# Altium PCB NUC972 DEV BOARD-2 20150128.PcbDoc (part 4 of 5)
Units mil, origin at the board's own origin, x right, y up, seen from the top; angles counter-clockwise.
Board outline 10236.22 x 7677.17 mil, 4 copper layers (Top, 2-GND, 3-POWER, Bottom), stack 35.4 mil thick; 572 components, 593 nets, 2369 pads, 1783 vias.
Unrouted connection lines stored in the file: 1277.
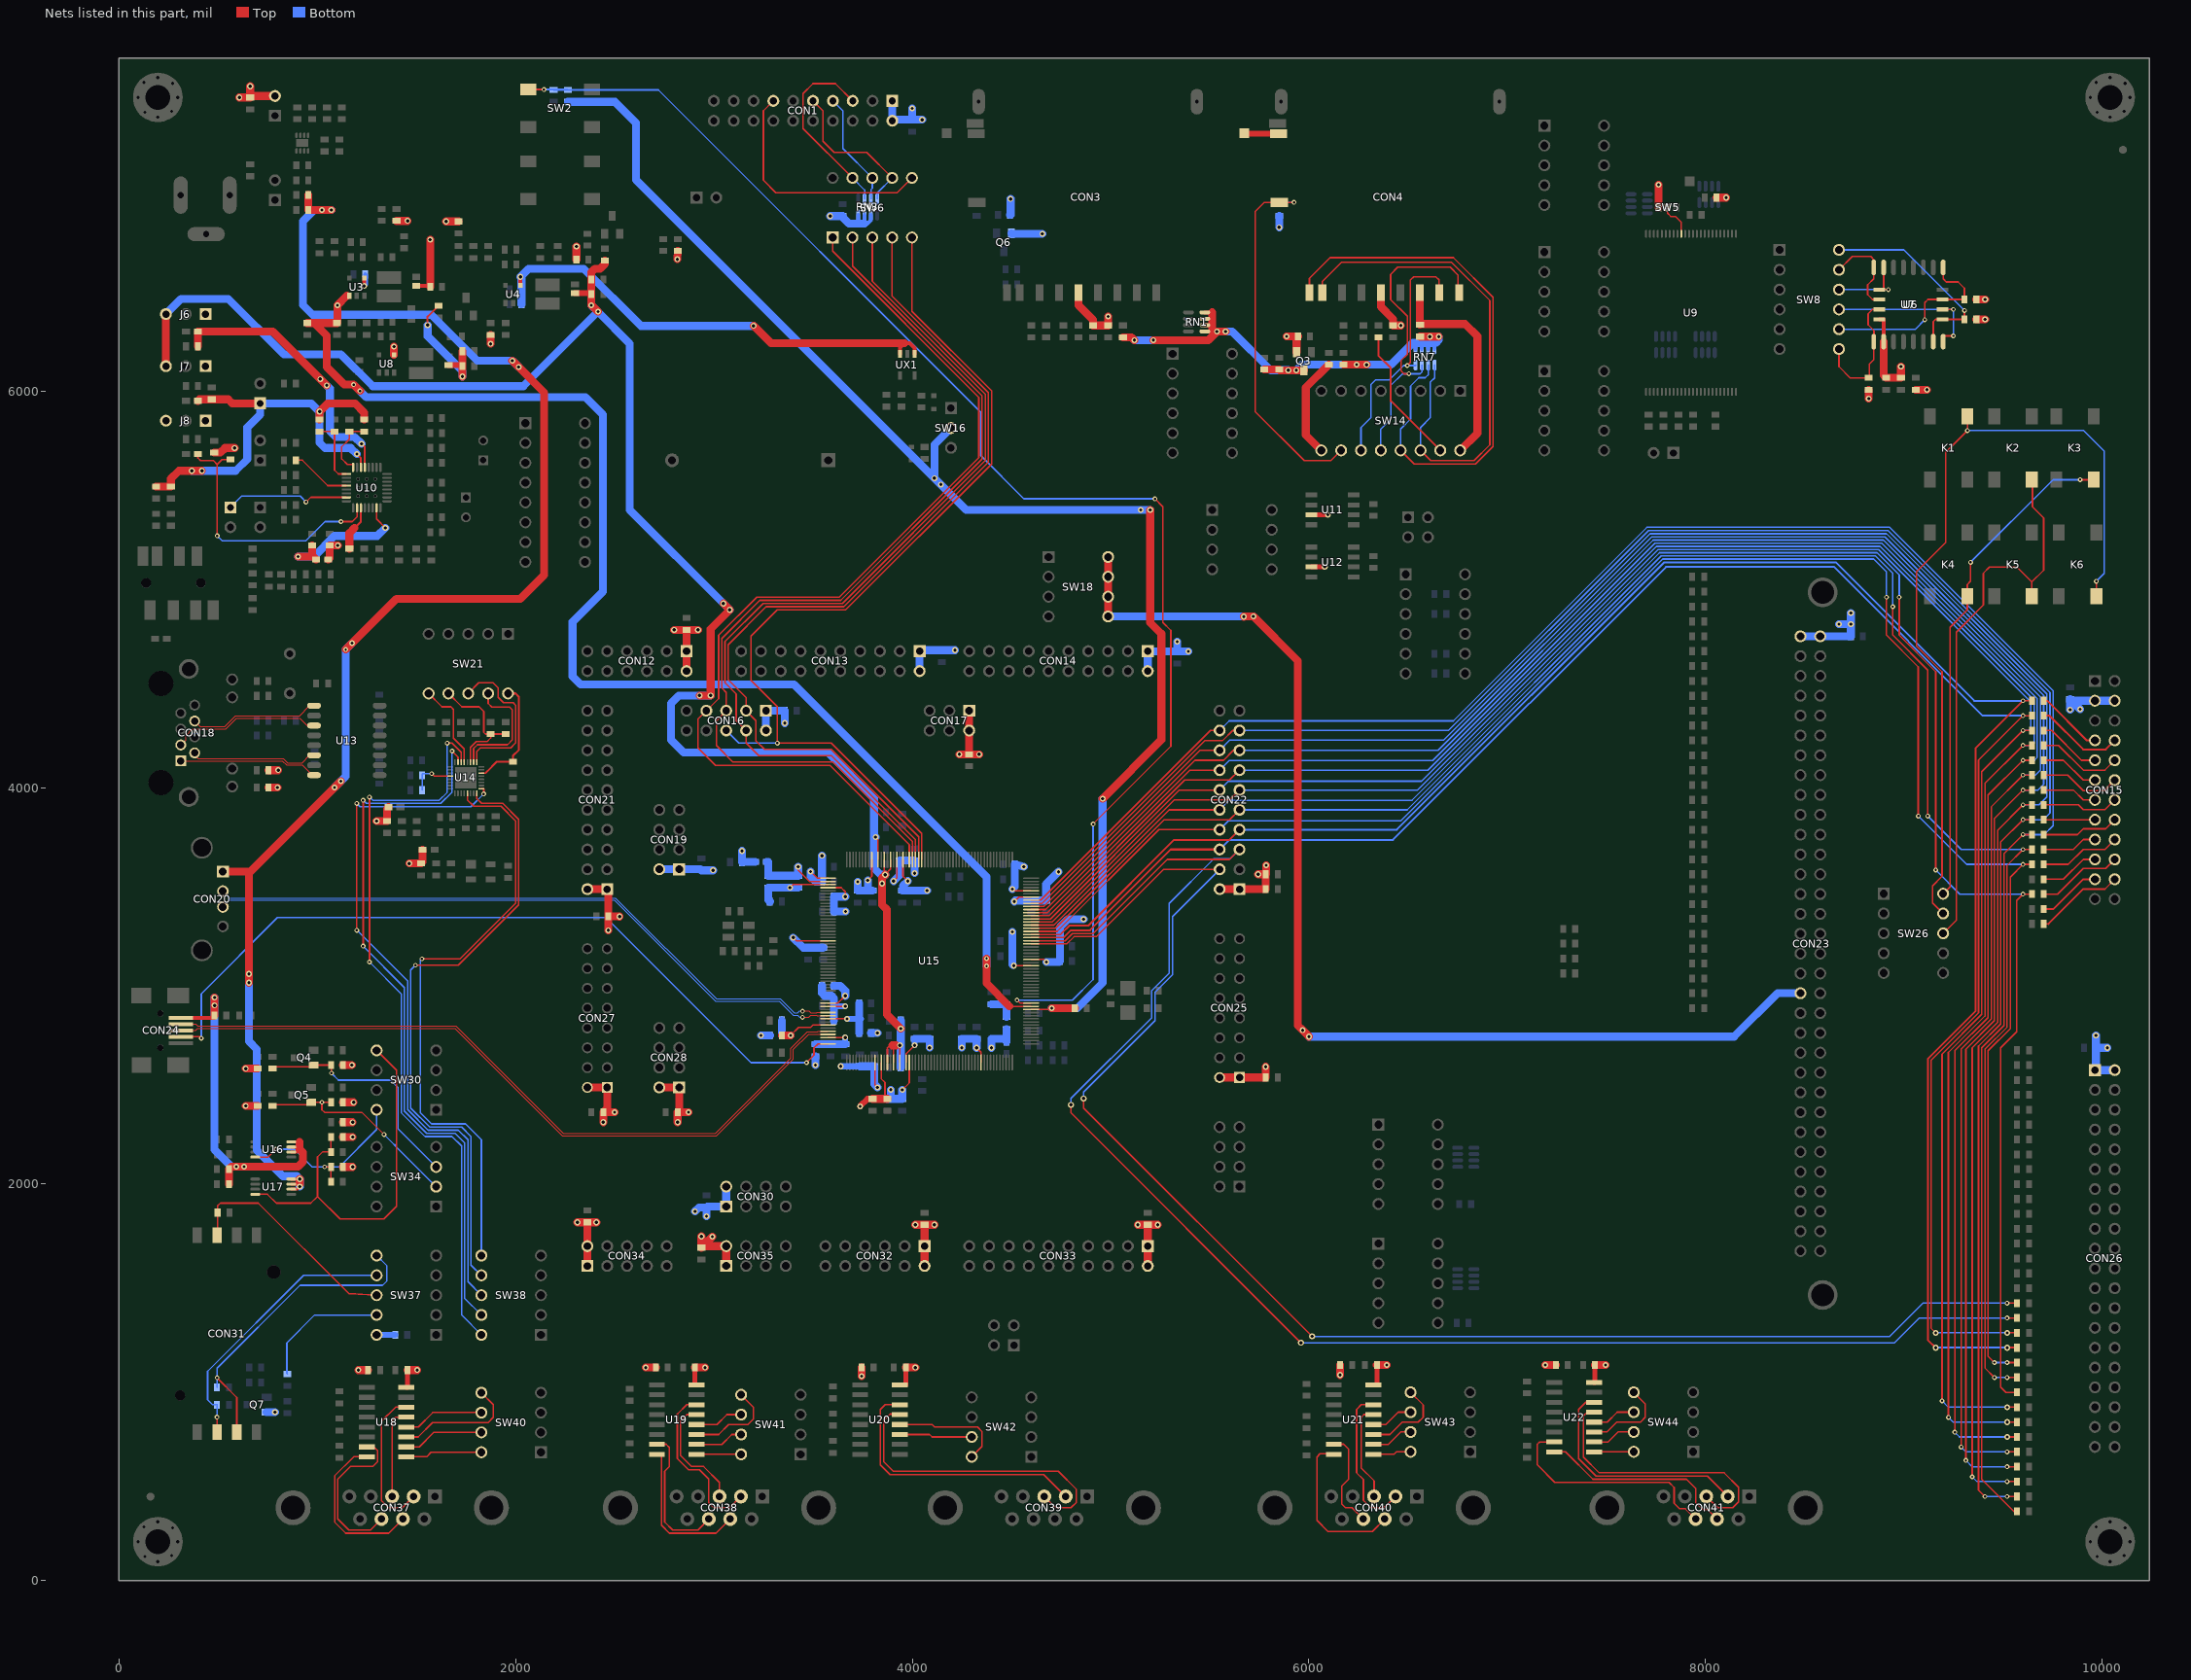
[diagram p6: the nets of this part, all layers, seen from the top]

## Via types
v1: diameter 24, hole 12, Top to Bottom, 1202 vias
v2: diameter 30, hole 16, Top to Bottom, 581 vias

## Nets (pads, with @x,y where several pads share a name; then routed paths per layer and width w, separated by ;. In a path a pad name is that pad's centre, name@x,y a point inside that pad or via, vN(x,y) a via of type N, cw(c..) or ccw(c..) an arc to the next point about the centre after c; other vN are vias at no path point) (continued)
PI1: CON22.4 RB22.1 U15.87 | length 7846.8
  Top w8: U15.87@4599.31,3211.61 4779.61,3211.61 4816,3248 4928,3248 5267.5,3587.5 CON22.4@5550,3587.5 ; v2(4864,2432) 4864,2384 v2(6016,1232) ; v1(9520,1400) RB22.1@9570,1400
  Bottom w8: v2(4864,2432) 4864,2464 5224,2824 5224,2968 5312,3056 5312,3349.5 CON22.4@5550,3587.5 ; v2(6016,1232) 8928,1232 9096,1400 v1(9520,1400)
PI2: CON22.5 RB23.1 U15.88 | length 8271.5
  Top w8: U15.88@4599.31,3227.36 4771.36,3227.36 4808,3264 4912,3264 5285.5,3637.5 5600,3637.5 CON22.5@5650,3687.5 ; v2(4800,2400) 4800,2360 v2(5960,1200) ; v1(9520,1325) RB23.1@9570,1325
  Bottom w8: v2(4800,2400) 4800,2432 5208,2840 5208,2976 5296,3064 5296,3416 5520,3640 5602.5,3640 CON22.5@5650,3687.5 ; v2(5960,1200) 8952,1200 9077,1325 v1(9520,1325)
PI3: CON22.6 RB24.1 RS2.1 U15.89 | length 9854.9
  Top w8: U15.89@4599.31,3243.11 4763.11,3243.11 4768,3248 ; v2(9160,1250) 9136,1274 9136,2624 9376,2864 9376,4138.5 v1(9600,4362.5) RS2.1@9645,4362.5 ; v2(9520,1250) RB24.1@9570,1250
  Top w10: 4768,3248 4800,3280 4896,3280 5303.5,3687.5 CON22.6@5550,3687.5
  Bottom w8: v2(9160,1250) v2(9520,1250)
  Bottom w10: CON22.6@5550,3687.5 5598.5,3736 6424,3736 7800,5112 8648,5112 9397.5,4362.5 v1(9600,4362.5)
PI4: CON22.7 RB25.1 RS3.1 U15.90 | length 10000.4
  Top w8: U15.90@4599.31,3258.86 4746.86,3258.86 4752,3264 ; v1(9600,4437.5) RS3.1@9645,4437.5
  Top w10: 4752,3264 4792,3304 4888,3304 5320,3736 5598.5,3736 CON22.7@5650,3787.5 ; v2(9160,1175) 9120,1215 9120,2632 9360,2872 9360,4197.5 v1(9600,4437.5) ; v2(9520,1175) RB25.1@9570,1175
  Bottom w10: CON22.7@5650,3787.5 6443.5,3787.5 7792,5136 8656,5136 9354.5,4437.5 v1(9600,4437.5) ; v2(9160,1175) v2(9520,1175)
PI5: CON22.8 RB26.1 RS4.1 U15.91 | length 9801.6
  Top w8: U15.91@4599.31,3274.61 4730.61,3274.61 5243.5,3787.5 CON22.8@5550,3787.5 ; v1(8912,4960) 8912,4768 9072,4608 v1(9072,3856) ; v1(9456,1100) 9424,1132 9424,2672 9536,2784 9536,3548.5 v1(9600,3612.5) RS4.1@9645,3612.5 ; v1(9520,1100) RB26.1@9570,1100
  Bottom w8: CON22.8@5550,3787.5 5594.5,3832 6464,3832 7784,5152 8848,5152 8856,5144 8912,5088 v1(8912,4960) ; v1(9072,3856) 9315.5,3612.5 v1(9600,3612.5) ; v1(9456,1100) v1(9520,1100)
PI6: CON22.9 RB27.1 RS5.1 U15.92 | length 9926.5
  Top w8: U15.92@4599.31,3290.35 4722.35,3290.35 5269.5,3837.5 5600,3837.5 CON22.9@5650,3887.5 ; v1(8944,4912) 8944,4768 9120,4592 v1(9120,3856) ; v1(9456,1025) 9408,1073 9408,2680 9520,2792 9520,3607.5 v1(9600,3687.5) RS5.1@9645,3687.5 ; v1(9520,1025) RB27.1@9570,1025
  Bottom w8: CON22.9@5650,3887.5 6495.5,3887.5 7776,5168 8856,5168 8944,5080 v1(8944,4912) ; v1(9120,3856) 9288.5,3687.5 v1(9600,3687.5) ; v1(9456,1025) v1(9520,1025)
PI7: CON22.10 RB28.1 RS6.1 U15.93 | length 9926.1
  Top w8: U15.93@4599.31,3306.1 4714.1,3306.1 5295.5,3887.5 CON22.10@5550,3887.5 ; v1(8976,4960) 8976,4768 9160,4584 v1(9160,3584) ; RB28.1@9570,950 9514,950 9488,976 9488,2688 9568,2768 9568,3430.5 v1(9600,3462.5) RS6.1@9645,3462.5
  Bottom w8: CON22.10@5550,3887.5 5598.5,3936 6520,3936 7768,5184 8864,5184 8976,5072 v1(8976,4960) ; v1(9160,3584) 9281.5,3462.5 v1(9600,3462.5)
PI8: CON22.11 RB29.1 RS7.1 U15.94 | length 10302.3
  Top w8: U15.94@4599.31,3321.85 4705.85,3321.85 5321.5,3937.5 5600,3937.5 CON22.11@5650,3987.5 ; v1(9192,907) 9192,2656 9392,2856 9392,4079.5 v1(9600,4287.5) RS7.1@9645,4287.5 ; v2(9520,875) RB29.1@9570,875
  Bottom w8: CON22.11@5650,3987.5 6547.5,3987.5 7760,5200 8872,5200 9640,4432 9640,4295.5 9632,4287.5 v1(9600,4287.5) ; v1(9192,907) 9224,875 v2(9520,875)
PI9: CON22.12 RB30.1 RS8.1 U15.95 | length 10378.1
  Top w8: U15.95@4599.31,3337.6 4697.6,3337.6 5347.5,3987.5 CON22.12@5550,3987.5 ; v1(9224,824) 9224,2664 9408,2848 9408,4020.5 v1(9600,4212.5) RS8.1@9645,4212.5 ; v2(9520,800) RB30.1@9570,800
  Bottom w8: CON22.12@5550,3987.5 5594.5,4032 6568,4032 7752,5216 8880,5216 9656,4440 9656,4224 9644.5,4212.5 v1(9600,4212.5) ; v1(9224,824) 9248,800 v2(9520,800)
PI10: CON22.13 RB31.1 RS9.1 U15.96 | length 10449.5
  Top w8: U15.96@4599.31,3353.35 4689.35,3353.35 5373.5,4037.5 5600,4037.5 CON22.13@5650,4087.5 ; v1(9256,749) 9256,2672 9424,2840 9424,3961.5 v1(9600,4137.5) RS9.1@9645,4137.5 ; v2(9520,725) RB31.1@9570,725
  Bottom w8: CON22.13@5650,4087.5 6599.5,4087.5 7744,5232 8888,5232 9672,4448 9672,4152 9657.5,4137.5 v1(9600,4137.5) ; v1(9256,749) 9280,725 v2(9520,725)
PI11: CON22.14 RB32.1 RS10.1 U15.97 | length 10516.3
  Top w8: U15.97@4599.31,3369.09 4681.09,3369.09 5399.5,4087.5 CON22.14@5550,4087.5 ; v1(9288,674) 9288,2680 9440,2832 9440,3902.5 v1(9600,4062.5) RS10.1@9645,4062.5 ; v1(9520,650) RB32.1@9570,650
  Bottom w8: CON22.14@5550,4087.5 5598.5,4136 6624,4136 7736,5248 8896,5248 9688,4456 9688,4088 9662.5,4062.5 v1(9600,4062.5) ; v1(9288,674) 9312,650 v1(9520,650)
PI12: CON22.15 RB33.1 RS11.1 U15.98 | length 10594.3
  Top w8: U15.98@4599.31,3384.84 4672.84,3384.84 5425.5,4137.5 5569.5,4137.5 5619.5,4187.5 CON22.15@5650,4187.5 ; v1(9312,607) 9312,2680 9456,2824 9456,3843.5 v1(9600,3987.5) RS11.1@9645,3987.5 ; v1(9520,575) RB33.1@9570,575
  Bottom w8: CON22.15@5650,4187.5 6651.5,4187.5 7728,5264 8904,5264 9704,4464 9704,4016 9675.5,3987.5 v1(9600,3987.5) ; v1(9312,607) 9344,575 v1(9520,575)
PI13: CON22.16 RB34.1 RS12.1 U15.99 | length 10665.7
  Top w8: U15.99@4599.31,3400.59 4664.59,3400.59 5451.5,4187.5 CON22.16@5550,4187.5 ; v1(9344,524) 9344,2688 9472,2816 9472,3784.5 v1(9600,3912.5) RS12.1@9645,3912.5 ; v1(9520,500) RB34.1@9570,500
  Bottom w8: CON22.16@5550,4187.5 5602.5,4240 6680,4240 7720,5280 8912,5280 9720,4472 9720,3952 9680.5,3912.5 v1(9600,3912.5) ; v1(9344,524) 9368,500 v1(9520,500)
PI14: CON22.17 RB35.1 RS13.1 U15.100 | length 10737.1
  Top w8: U15.100@4599.31,3416.34 4656.34,3416.34 5477.5,4237.5 5566,4237.5 5616,4287.5 CON22.17@5650,4287.5 ; v1(9408,425) 9376,457 9376,2696 9488,2808 9488,3725.5 v1(9600,3837.5) RS13.1@9645,3837.5 ; v1(9520,425) RB35.1@9570,425
  Bottom w8: CON22.17@5650,4287.5 6703.5,4287.5 7712,5296 8920,5296 9736,4480 9736,3872 9701.5,3837.5 v1(9600,3837.5) ; v1(9408,425) v1(9520,425)
PI15: CON22.18 RB36.1 RS14.1 U15.101 | length 10750.3
  Top w8: U15.101@4599.31,3432.09 4648.09,3432.09 5503.5,4287.5 CON22.18@5550,4287.5 ; RB36.1@9570,350 9554,350 9392,512 9392,2688 9504,2800 9504,3666.5 v1(9600,3762.5) RS14.1@9645,3762.5
  Bottom w8: CON22.18@5550,4287.5 5598.5,4336 6728,4336 7704,5312 8928,5312 9752,4488 9752,3808 9706.5,3762.5 v1(9600,3762.5)
PJ0: CON16.3 SW6.4 U15.139 | length 4705.8
  Top w8: SW6.4@3899,6774 3899,6477 4384,5992 4384,5640 3656,4912 3264,4912 3072,4720 3072,4544 3162.5,4453.5 CON16.3@3162.5,4387.5 3212.5,4337.5 3212.5,4235.5 3256,4192 3592,4192 4032.38,3751.62 U15.139@4032.38,3636.81
PJ1: CON16.4 SW6.3 U15.140 | length 4763
  Top w8: SW6.3@3799,6774 3799,6553 4368,5984 4368,5648 3648,4928 3248,4928 3056,4736 3056,4528 3112.5,4471.5 3112.5,4337.5 CON16.4@3162.5,4287.5 3162.5,4224 3226.5,4160 3592.63,4160 4016.63,3736 U15.140@4016.63,3636.81
PJ2: CON16.5 SW6.2 U15.141 | length 4925.3
  Top w8: SW6.2@3699,6774 3699,6629 4352,5976 4352,5656 3640,4944 3232,4944 3040,4752 3040,4502.5 3062.5,4480 CON16.5@3062.5,4387.5 3012.5,4337.5 3012.5,4211.5 3096,4128 3600.89,4128 4000.89,3728 U15.141@4000.89,3636.81
PJ3: CON16.6 SW6.5 U15.138 | length 4806.7
  Top w8: SW6.5@3999,6774 3999,6401 4400,6000 4400,5632 3664,4896 3320,4896 3187.5,4763.5 3187.5,4540.5 3320,4408 v1(3320,4224) 3592,4224 4048.13,3767.87 U15.138@4048.13,3636.81
  Bottom w8: CON16.6@3062.5,4287.5 3126,4224 v1(3320,4224)
PJ4: CON16.7 SW6.1 U15.142 | length 5051.5
  Top w8: SW6.1@3599,6774 3599,6705 4336,5968 4336,5664 3632,4960 3216,4960 3024,4768 3024,4449 CON16.7@2962.5,4387.5 2920.5,4345.5 2920.5,4199.5 3008,4112 3585.14,4112 3985.14,3712 U15.142@3985.14,3636.81
PLLVD12: CT73.1 CT75.2 L13.2 U15.164 | length 463.6
  Top w8: v2(3425,3600) 3425,3583 3481.43,3526.57 U15.164@3575.69,3526.57
  Bottom w40: L13.2@3267.5,3625 3275,3625 CT73.1@3275,3555 CT75.2@3425,3555 v2(3425,3600)
PLLVS: CT73.2 CT75.1 RG1.2 U15.165 | length 421.4
  Top w8: v2(3384,3495) 3399.83,3510.83 U15.165@3575.69,3510.83
  Bottom w40: RG1.2@3282.5,3425 3275,3432.5 CT73.2@3275,3495 v2(3384,3495) CT75.1@3425,3495
PSL: SW5.2 U9.39 | length 175.3
  Top w8: SW5.2@7807.5,6925 7808,6924.5 7808,6896 7824,6880 7848,6880 7877.17,6850.83 U9.39@7877.17,6792.62
PWM: CON23.37 SW18.5 SW18.6 SW18.7 SW18.8 | length 5883.9
  Top w40: SW18.5@4987.5,4862.5 SW18.6@4987.5,4962.5 SW18.7@4987.5,5062.5 SW18.8@4987.5,5162.5 ; v2(5672,4862) 5672.5,4862.5 v2(5720,4862.5) 5944,4638.5 5944,2800 v2(5968,2776) v2(6000,2744)
  Bottom w40: SW18.5@4987.5,4862.5 v2(5720,4862.5) ; v2(6000,2744) 8144,2744 8362.6,2962.6 CON23.37@8478.15,2962.6
RAUXI: C16.2 U10.20 | length 308.3
  Top w8: C16.2@892.5,5650 892.84,5650.34 925.66,5650.34 1053.66,5522.34 U10.20@1147.64,5522.34
REGOUT: CB13.2 CT66.1 U14.28 | length 229.5
  Top w8: v1(1577.37,4070) 1590,4057.37 U14.28@1670.76,4057.37
  Bottom w8: CT66.1@1529.5,3987 CB13.2@1529.5,4062 1529.5,4070 v1(1577.37,4070)
RMII0CRSDV: R69.1 R70.2 SW21.7 U14.19 | length 650.6
  Top w8: SW21.7@1662,4474.5 1729.7,4406.8 1817.2,4406.8 1840,4384 1840,4278 1848,4270 R69.1@1875,4270 ; U14.19@1773.12,4128.24 1773.12,4202.38 1802.75,4232 1857,4232 1875,4250 R69.1@1875,4270 ; R70.2@1950,4270 1879,4269.5 R69.1@1875,4270
RMII0MDC: SW38.10 U14.22 | length 3827.2
  Top w8: v1(1264,3120) v1(1264,3952) ; v1(1656,4224) 1680,4224 1725.88,4178.12 U14.22@1725.88,4128.24
  Bottom w8: v1(1264,3120) 1424,2960 1424,2360 1544,2240 1680,2240 1728,2192 1728,1340 SW38.10@1828,1240 ; v1(1264,3952) 1280,3936 1616,3936 1656,3976 v1(1656,4224)
RMII0MDIO: SW38.9 U14.23 | length 3681.3
  Top w8: v1(1232,3200) v1(1232,3936) ; v1(1680,4184) 1710.13,4153.87 U14.23@1710.13,4128.24
  Bottom w8: v1(1232,3200) 1440,2992 1440,2368 1552,2256 1696,2256 1744,2208 1744,1424 SW38.9@1828,1340 ; v1(1232,3936) 1248,3920 1624,3920 1680,3976 v1(1680,4184)
RMII0REFCLK: R72.1 SW21.10 U14.14 | length 583.7
  Top w8: U14.14@1828.24,4073.12 1849.12,4073.12 1856,4080
  Top w10: 1856,4080 1905.83,4129.83 1962.47,4129.83 R72.1@1987.5,4130 1987.5,4160 2016,4188.5 2016,4458.5 2000,4474.5 SW21.10@1962,4474.5
RMII0RXD0: SW21.9 U14.18 | length 619.4
  Top w8: U14.18@1788.87,4128.24 1788.87,4196.91 1807.96,4216 1960,4216 1984,4240 1984,4392 1970.15,4405.85 1880.15,4405.85 1862,4424 SW21.9@1862,4474.5
RMII0RXD1: SW21.8 U14.17 | length 793.1
  Top w8: SW21.8@1762,4474.5 1815,4528 1887,4528 1912,4503 1912,4455 1939.82,4427.18 1988.82,4427.18 2000,4416 2000,4224 1976,4200 1823,4200 1804.62,4181.62 U14.17@1804.62,4128.24
RMII0TXD0: SW38.8 U14.9 | length 3540.4
  Top w8: v1(1200,3280) v1(1200,3920) ; U14.9@1828.24,3994.38 1840,3994.38 v1(1840,3968)
  Bottom w8: v1(1200,3280) 1456,3024 1456,2376 1560,2272 1712,2272 1760,2224 1760,1508 SW38.8@1828,1440 ; v1(1200,3920) 1216,3904 1776,3904 v1(1840,3968)
RMII0TXD1: SW38.7 U14.8 | length 3174.3
  Top w8: v1(1496,3104) 1712,3104 2016,3408 2016,3840 1936,3920 1828.62,3920 1804.62,3944 U14.8@1804.62,3970.76
  Bottom w8: v1(1496,3104) 1472,3080 1472,2384 1568,2288 1728,2288 1776,2240 1776,1592 SW38.7@1828,1540
RMII0TXEN: SW38.6 U14.5 | length 3051.2
  Top w8: v1(1528,3136) 1720,3136 2000,3416 2000,3832 1927,3905 1789.87,3905 1757.37,3937.5 U14.5@1757.37,3970.76
  Bottom w8: v1(1528,3136) 1520,3128 1520,2360 1576,2304 1748,2304 1828,2224 SW38.6@1828,1640
RMIIRXERR: SW21.6 U14.21 | length 447.1
  Top w8: SW21.6@1562,4474.5 1629.5,4407 1674.59,4407 1687.5,4394.09 1687.5,4248.5 1741.63,4194.37 U14.21@1741.63,4128.24
ROW0: K3.3 K4.3 SW26.10 | length 2522.5
  Top w8: SW26.10@9197.64,3464.57 9232,3498.93 9232,4808.32 9319.69,4896 K4.3@9319.69,4965.16 9319.69,5024 9336,5040.32 v1(9336,5136) ; v1(9888,5552) 9956.53,5552 K3.3@9957.19,5552.66
  Bottom w8: v1(9336,5136) 9752,5552 v1(9888,5552)
ROW1: K1.4 K6.3 SW26.9 | length 4189.6
  Top w8: SW26.9@9197.64,3364.57 9144,3418.2 9144,3504 9192,3552 9192,4584 9064,4712 9064,5089.67 9210.13,5235.8 9211,5236 9211,5691 v1(9320,5800) 9320,5872.03 K1.4@9319.69,5872.34 ; K6.3@9969.69,4965.16 v1(9969.69,5040)
  Bottom w8: v1(9320,5800) 9905.69,5800 10009.69,5696 10009.69,5080 v1(9969.69,5040)
ROW2: K2.3 K5.3 SW26.8 | length 2825.7
  Top w8: SW26.8@9197.64,3264.57 9264,3330.93 9264,4784 9400,4920 9400,5080.68 9431.66,5112.34 9569.03,5112.34 9644.69,5036.68 ; K5.3@9644.69,4965.16 9644.69,5036.68 ; K2.3@9644.69,5552.66 9648,5549.34 9648,5416 9704,5360 9704,5096 9644.69,5036.68
RSPKOUT: CON8.1 U10.23 | length 630.8
  Top w8: v1(944,5439.29) 968,5463.29 U10.23@1147.64,5463.29
  Bottom w8: CON8.1@562.5,5412.5 619,5469 914.29,5469 v1(944,5439.29)
RTCVD: CB10.1 R96.2 SW16.2 U15.66 | length 7426.8
  Top w8: U15.66@4599.31,2880.91 4820,2880.91 CB10.1@4820,2887.5
  Top w40: v2(4704,2887.5) CB10.1@4820,2887.5 ; v2(4960,3944) 5256,4240 5256,4776 5200,4832 v2(5200,5400)
  Bottom w40: R96.2@2264,7458 2502.5,7457.5 2608,7352 2608,7064 v2(4112,5560) ; SW16.2@4195.5,5813 4112,5729.5 v2(4112,5560) ; v2(4704,2887.5) 4704.5,2888 4832,2888 4960,3016 v2(4960,3944) ; v2(5200,5400) v2(5152,5400) 4272,5400 v2(4144,5528) v2(4112,5560)
RX+: CON18.3 U13.11 | length 756.7
  Top w4: CON18.3@312.5,4214.76 337.6,4239.87 337.6,4261.56 371.12,4295.08 539.13,4295.08 594.55,4350.5 912,4350.5 950,4312.5 U13.11@984.5,4312.5
RX-: CON18.6 U13.9 | length 657.3
  Top w4: CON18.6@382.58,4335.24 410.74,4307.08 534.16,4307.08 589.58,4362.5 912.5,4362.5 962.5,4412.5 U13.9@984.5,4412.5
S_CLK: CON15.8 RS2.2 | length 447
  Top w10: RS2.2@9705,4362.5 9733.5,4362.5 9904,4192 10017,4192 CON15.8@10062.5,4237.5
S_D0: CON15.9 RS7.2 | length 319.6
  Top w8: RS7.2@9705,4287.5 9744.5,4287.5 9894.5,4137.5 CON15.9@9962.5,4137.5
S_D1: CON15.10 RS8.2 | length 429.6
  Top w8: RS8.2@9705,4212.5 9779.5,4212.5 9904,4088 10013,4088 CON15.10@10062.5,4137.5
S_D2: CON15.11 RS9.2 | length 298.9
  Top w8: RS9.2@9705,4137.5 9804,4137.5 9904,4037.5 CON15.11@9962.5,4037.5
S_D3: CON15.12 RS10.2 | length 412.2
  Top w8: RS10.2@9705,4062.5 9825.5,4062.5 9904,3984 10009,3984 CON15.12@10062.5,4037.5
S_D4: CON15.13 RS11.2 | length 278.2
  Top w8: RS11.2@9705,3987.5 9854,3987.5 9904,3937.5 CON15.13@9962.5,3937.5
S_D5: CON15.14 RS12.2 | length 388.2
  Top w8: RS12.2@9705,3912.5 9879.5,3912.5 9904,3888 10013,3888 CON15.14@10062.5,3937.5
S_D6: CON15.15 RS13.2 | length 257.5
  Top w8: RS13.2@9705,3837.5 CON15.15@9962.5,3837.5
S_D7: CON15.16 RS14.2 | length 388.6
  Top w8: RS14.2@9705,3762.5 9874.5,3762.5 9904,3792 10017,3792 CON15.16@10062.5,3837.5
S_HSYNC: CON15.18 RS4.2 | length 409.3
  Top w8: RS4.2@9705,3612.5 9828.5,3612.5 9904,3688 10013,3688 CON15.18@10062.5,3737.5
S_NRST: CON15.20 RS6.2 | length 430
  Top w8: RS6.2@9705,3462.5 9774.5,3462.5 9904,3592 10017,3592 CON15.20@10062.5,3637.5
S_PCLK: CON15.7 RS3.2 | length 340.3
  Top w10: RS3.2@9705,4437.5 9722.5,4437.5 9922.5,4237.5 CON15.7@9962.5,4237.5
S_PWDN: CON15.19 RS1.2 | length 298.9
  Top w8: RS1.2@9705,3537.5 9804,3537.5 9904,3637.5 CON15.19@9962.5,3637.5
S_VSYNC: CON15.17 RS5.2 | length 278.2
  Top w8: RS5.2@9705,3687.5 9854,3687.5 9904,3737.5 CON15.17@9962.5,3737.5
SC0CD: R120.1 SW37.10 | length 94
  Bottom w30: SW37.10@1300,1240 R120.1@1394,1240
SC0CLK: CON31.3 R123.2 SW37.7 | length 1392
  Top w8: CON31.3@495,749.09 v1(495,825)
  Bottom w8: v1(495,825) R123.2@495,887.5 494.5,888 472,888 448,912 448,1056 932,1540 SW37.7@1300,1540
SC0DAT: CON31.7 R95.2 SW37.8 | length 1145.8
  Top w8: CON31.7@495,1742 495,1752 498,1755 R95.2@498,1856 498,1890 512,1904 702.72,1904 1160,1448 SW37.8@1300,1440
SC0PWR: R122.1 SW37.9 | length 669
  Bottom w8: R122.1@850,1042.5 847.5,1045 847.5,1200 987.5,1340 SW37.9@1300,1340
SC0RST: CON31.2 R121.2 SW37.6 | length 1600.8
  Top w8: v1(495.5,1023.5) 595,924 CON31.2@595,749.09
  Bottom w8: R121.2@495,975 495.5,975.5 v1(495.5,1023.5) 495.5,1071.5 914,1490 1330,1490 1352,1512 1352,1588 SW37.6@1300,1640
SCK: R42.2 RX4.2 U10.16 | length 311.8
  Top w8: U10.16@1181.1,5614.86 1181.1,5629 1152,5629 1124,5657 1124,5718.5 1162.5,5757 R42.2@1162.5,5795 RX4.2@1237.5,5795
SDA: R41.2 RX3.2 U10.17 | length 337.9
  Top w8: RX3.2@1012.5,5795 R41.2@1087.5,5795 1087.5,5600.5 1107,5581 1147.24,5581 U10.17@1147.64,5581.4
SDCD: CON4.10 R99.1 SW14.10 | length 1860.1
  Top w8: v1(5925,6950.89) CON4.10@5850.89,6950.89 5850,6950 5775,6950 5728.5,6903.5 5728.5,5896.5 5977,5648 6110.5,5648 SW14.10@6162.5,5700
  Bottom w8: R99.1@5850,6942.5 5858.39,6950.89 v1(5925,6950.89)
SDCLK: R28.2 SW14.15 | length 699.4
  Top w10: R28.2@6350,6270 6350,6178 6412.5,6115.5 6412.5,5950 SW14.15@6662.5,5700
SDCMD: CON4.2 R29.1 SW14.16 | length 1090.8
  Top w40: CON4.2@6559.74,6496.16 6559.74,6334.26 R29.1@6560,6334 6563.5,6337.5 6787.5,6337.5 6850,6275 6850,5787.5 SW14.16@6762.5,5700
SDD0: CON4.7 RN7.2 SW14.14 | length 2611.6
  Top w8: CON4.7@6067.62,6496.16 6067.62,6552 6163.62,6648 6720,6648 6912,6456 6912,5728 6832,5648 6614.5,5648 SW14.14@6562.5,5700
  Bottom w8: SW14.14@6562.5,5700 6562.5,5816 6612.5,5866 6612.5,6044.5 6633.5,6065.5 RN7.2@6633.5,6130.5
SDD1: CON4.8 RN7.4 SW14.13 | length 2912
  Top w8: CON4.8@6002.66,6496.16 6002.66,6568 6106.66,6672 6728,6672 6928,6472 6928,5720 6840,5632 6530.5,5632 SW14.13@6462.5,5700
  Bottom w8: SW14.13@6462.5,5700 6462.5,5808 6512.5,5858 6512.5,6024.5 6554.5,6066.5 6586.5,6066.5 6601.5,6081.5 RN7.4@6601.5,6130.5
SDD2: CON4.9 RN7.6 SW14.12 | length 1609.1
  Top w8: v1(6504,6086.5) 6480,6086.5 6464,6102.5 6464,6152 6496,6184 6496,6376 6412.11,6459.89 6412.11,6588.11 6448,6624 6712,6624 6752,6584 6752,6500.76 CON4.9@6756.59,6496.16
  Bottom w8: SW14.12@6362.5,5700 6362.5,5806.5 6412.5,5856.5 6412.5,6027 6472,6086.5 v1(6504,6086.5) 6560,6086.5 6569.5,6096 RN7.6@6569.5,6130.5
SDD3: CON4.1 RN7.8 SW14.11 | length 1280.9
  Top w8: v1(6496,6128) 6511.56,6143.56 6511.56,6559.56 6528,6576 6640,6576 6656,6560 6656,6498.33 CON4.1@6658.17,6496.16
  Bottom w8: SW14.11@6262.5,5700 6262.5,5816 6312.5,5866 6312.5,6032.5 6336,6056 6405,6056 6477,6128 v1(6496,6128) 6537.5,6128 RN7.8@6537.5,6130.5
SDPWR: R31.1 SW14.9 | length 513.1
  Top w40: SW14.9@6062.5,5700 5984,5778.5 5984,6016.5 R31.1@6100,6132.5
SDVD33: CT19.2 Q3.D R26.2 R29.2 R30.2 R32.1 RN1.1 RN1.3 RN1.5 RN1.7 RN7.1 RN7.3 RN7.5 RN7.7 | length 2667.4
  Top w20: RN1.7@5475,6300 5512.5,6300 ; RN1.5@5475,6332 5512.5,6332 ; RN1.3@5475,6364 5512.5,6364 ; RN1.1@5475,6396 5512.5,6396
  Top w40: R26.2@5062.5,6270 5106,6270 v2(5120,6256) ; v2(5216,6256) 5492,6256 v2(5536,6300) ; 5512.5,6396 5512.5,6364 5512.5,6332 5512.5,6300 v2(5536,6300) ; v2(5580,6300) v2(5536,6300) ; CT19.2@5775,6107.5 R30.2@5850,6107.5 5853.5,6104 v2(5896,6104) v2(5936,6104) Q3.D@5975,6104.72 ; R32.1@6175,6132.5 v2(6240,6132.5) 6290.5,6132.5 v2(6291,6132) ; R29.2@6560,6274 v2(6610,6274) v2(6655,6274)
  Bottom w20: RN7.7@6537.5,6212.5 6537.5,6242.22 ; RN7.5@6569.5,6212.5 6569.5,6242.22 ; RN7.3@6601.5,6212.5 6601.5,6242.22 ; RN7.1@6633.5,6212.5 6633.5,6242.22
  Bottom w40: v2(5120,6256) v2(5216,6256) ; v2(5536,6300) v2(5580,6300) 5612.72,6300 5808,6104.72 5896,6104.23 v2(5936,6104) 5964.48,6132.5 v2(6240,6132.5) 6415.28,6132.5 6525,6242.22 6537.5,6242.22 6569.5,6242.22 6601.5,6242.22 6633.5,6242.22 6641.86,6243.78 6655,6256.92 v2(6655,6274) v2(6610,6274)
SDWP: CON4.11 PAD2.\ | length 174.6
  Top w30: PAD2.\@5675,7300 5675,7297.34 CON4.11@5846.95,7297.34
SIICCLK: CON15.21 RS15.2 | length 319.6
  Top w10: RS15.2@9705,3387.5 9754,3387.5 9904,3537.5 CON15.21@9962.5,3537.5
SIICSDA: CON15.22 RS16.2 | length 450.7
  Top w8: RS16.2@9705,3312.5 9728.5,3312.5 ; 9904,3488 10013,3488 CON15.22@10062.5,3537.5
  Top w10: 9728.5,3312.5 9904,3488
SPICLK: SW8.11 U6.6 U7.16 | length 469.5
  Top w8: SW8.11@8672.5,6611 8739,6677.5 8833,6677.5 8849,6661.5 8849,6622.52 U7.16@8847.5,6622.52 8847.5,6565.5 8817,6535 8817,6485.5 8841,6461.5 8875,6461.5 U6.6@8875.5,6461
SPICS: R18.1 SW8.12 U6.1 U7.7 | length 1066.8
  Top w8: U7.7@9147.5,6248.5 9147.5,6349.5 9159,6361 U6.1@9194.5,6361 R18.1@9305,6361 v1(9305,6405.5)
  Bottom w8: SW8.12@8672.5,6711 8999.5,6711 v1(9305,6405.5)
SPIDI/D1: SW8.9 U6.2 U7.8 | length 845
  Top w8: U6.2@9194.5,6411 v1(9249,6411) ; U7.8@9197.5,6248.5 9197.5,6277.5 v1(9249,6277.5)
  Bottom w8: SW8.9@8672.5,6411 v1(9249,6411) v1(9249,6277.5)
SPIDO/D0: SW8.10 U6.5 U7.15 | length 405.6
  Top w8: U6.5@8875.5,6511 U6.5@8897.72,6511 ; U7.15@8897.5,6622.52 8897.5,6511.22 U6.5@8897.72,6511 ; v1(8921,6511) U6.5@8897.72,6511
  Bottom w8: SW8.10@8672.5,6511 v1(8921,6511)
SPIHLD/D3: R34.1 SW8.7 U6.7 U7.1 | length 673.5
  Top w8: SW8.7@8672.5,6211 8672.5,6122.5 8729,6066 R34.1@8822.5,6066 8825,6068.5 8825,6135 8847.5,6157.5 U7.1@8847.5,6248.5 8849,6250 8849,6304 8819.5,6333.5 8819.5,6389.5 8841,6411 U6.7@8875.5,6411
SPIWP/D2: R16.1 SW8.8 U6.3 U7.9 | length 986.2
  Top w8: v1(9105,6359) 9105,6445.5 9120.5,6461 U6.3@9194.5,6461 R16.1@9305,6461 9305,6517.5 9273,6549.5 9213.5,6549.5 9197.5,6565.5 U7.9@9197.5,6622.52
  Bottom w8: SW8.8@8672.5,6311 9057,6311 v1(9105,6359)
SPKVD: CT25.2 L6.1 U10.26 | length 1377.2
  Top w8: L6.1@398.75,5681.25 398.75,5661.75 412.5,5648 477,5648 496,5629 ; v1(496,5269) 496,5629 ; CT25.2@562.5,5655 560.5,5653 520,5653 496,5629 ; v1(1120,5341) 1176.79,5341 1200.79,5365 U10.26@1200.79,5410.14
  Bottom w8: v1(496,5269) 520,5245 944,5245 1040,5341 v1(1120,5341)
SYSPWREN: C8.1 R20.2 U3.1 U15.67 | length 6797.1
  Top w8: 1150,6479.97 U3.1@1162.6,6479.97 ; 4488.99,2896.65 U15.67@4599.31,2896.65
  Top w40: C8.1@950,6342.5 984,6342.5 ; 1150,6479.97 v2(1102,6431.97) 1102,6344.5 R20.2@1100,6342.5 984,6342.5 ; v1(1216,6000) v1(1184,6032) 1136,6032 1048,6120 1048,6278.5 984,6342.5 ; v1(4375,3137.5) v1(4375,3100) 4375,3013.41 4488.99,2896.65
  Bottom w40: v1(1216,6000) 1248,5968 2352,5968 2440,5880 2440,4988 2288,4836 2288,4560 2328,4520 3405,4520 4375,3550 v1(4375,3137.5) v1(4375,3100)
SYSWKUP: C61.1 R96.1 SW2.1 U15.68 | length 7405.6
  Top w8: SW2.1@2065.16,7519.69 2065.16,7520 v1(2144,7520) ; v1(4528.4,2928) 4544,2912.4 U15.68@4599.31,2912.4 ; v1(4912,3816) 5304,4208 5304,4792 5264,4832 5264,5416 v1(5224,5456)
  Bottom w8: v1(2144,7520) 2262.5,7520 C61.1@2192,7518 R96.1@2264,7518 2720,7517.5 4344,5893.5 4344,5675 4563,5456 v1(5224,5456) ; v1(4528.4,2928) 4808,2928 4912,3032 v1(4912,3816)
TCK: CON1.9 RN3.8 SW6.7 | length 786.4
  Top w8: CON1.9@3500,7462.5 3550,7412.5 3550,7259 3606,7203 3770,7203 SW6.7@3899,7074
  Bottom w8: RN3.8@3824,6968.5 3824,6999 SW6.7@3899,7074
TDI: CON1.5 RN3.4 SW6.9 | length 966.9
  Top w8: SW6.9@3699,7074 3450,7323 3450,7500 3500,7550 3612.5,7550 CON1.5@3700,7462.5
  Bottom w8: SW6.9@3699,7074 3760,7013 RN3.4@3760,6968.5
TDO: CON1.13 SW6.6 | length 1226.7
  Top w8: CON1.13@3300,7462.5 3250,7412.5 3250,7062.5 3312.5,7000 3924,6999 SW6.6@3999,7074
TMS: CON1.7 RN3.6 SW6.8 | length 579.3
  Bottom w8: CON1.7@3600,7462.5 3650,7412.5 3650,7223 SW6.8@3799,7074 3799,7022 3792,7015 RN3.6@3792,6968.5
TX+: CON18.1 U13.16 | length 701.8
  Top w4: CON18.1@312.5,4134.45 823.58,4134.45 845.03,4113 924.5,4113 975,4062.5 U13.16@984.5,4062.5
TX-: CON18.2 U13.14 | length 644.3
  Top w4: CON18.2@382.58,4174.61 382.58,4163.87 400,4146.45 828.55,4146.45 850,4125 925,4125 962.5,4162.5 U13.14@984.5,4162.5
UCTRL0: R93.1 R94.1 SW30.8 U16.4 | length 950.9
  Top w8: U16.4@687.5,2136.23 752,2136.23 v1(792,2176.23) ; v1(1037.5,2087) R93.1@1070,2087 R94.1@1070,2012
  Bottom w8: v1(792,2176.23) 885.77,2176.23 975,2087 v1(1037.5,2087) 1112,2087 1300,2275 SW30.8@1300,2374.5
UCTRL1: R91.1 R92.1 SW30.5 U17.4 | length 1999.4
  Top w8: U17.4@687.5,1948.73 749.27,1948.73 794,1904 968,1904 1001.77,1937.77 ; R91.1@1070,2237 R92.1@1070,2162 1026.77,2162 1001.77,2137 1001.77,1937.77 ; SW30.5@1300,2674.5 1400,2574.5 1400,1888 1336,1824 1115.54,1824 1001.77,1937.77
UDH0: CON20.2 U15.206 | length 3314.3
  Top w5: v1(3447.28,2872.03) 3457.28,2872.78 3480,2872.78 3489.5,2863.28 3518.12,2863.28 3520,2865.16 U15.206@3575.69,2865.16
  Bottom w5: CON20.2@525,3476.87 558.37,3443.5 2503.47,3443.5 3012.97,2934 3333.77,2934 3404.49,2863.28 3422.5,2863.28 3432,2872.78 3447.28,2872.78 v1(3447.28,2872.03)
UDH1: CON20.3 U15.207 | length 3314.5
  Top w5: v1(3446.91,2840.82) 3457.28,2841.78 3480,2841.78 3489.5,2851.29 3518.12,2851.29 3520,2849.41 U15.207@3575.69,2849.41
  Bottom w5: CON20.3@525,3398.13 558.37,3431.5 2498.5,3431.5 3008,2922 3328.8,2922 3399.51,2851.29 3422.5,2851.29 3432,2841.78 3446.91,2841.78 v1(3446.91,2840.82)
UDO0: CON24.2 U15.212 | length 3732.4
  Top w5: CON24.2@312.2,2806.3 387.5,2806.3 397.25,2796.55 1699.43,2796.55 2239.99,2256 3007.53,2256 3388,2636.47 3388,2683.99 3472.81,2768.79 3523.12,2768.79 3525,2770.67 U15.212@3575.69,2770.67
UDO1: CON24.3 U15.213 | length 3732.4
  Top w5: CON24.3@312.2,2774.8 387.5,2774.8 397.25,2784.55 1694.46,2784.55 2235.01,2244 3012.5,2244 3400,2631.5 3400,2679.01 3477.78,2756.8 3523.12,2756.8 3525,2754.92 U15.213@3575.69,2754.92
UDO2: CON24.4 U15.216 | length 4014.5
  Top w8: CON24.4@312.2,2743.31 312.9,2744 408,2744 v1(416,2736) ; v1(3467.32,2612.5) 3504.82,2650 3504.82,2687.5 3525,2707.68 U15.216@3575.69,2707.68
  Bottom w8: v1(416,2736) 416,2960 800,3344 2456,3344 3187.5,2612.5 v1(3467.32,2612.5)
UDVD33: CB24.1 CT85.1 R115.1 | length 140
  Bottom w40: CT85.1@4400,2907.5 CB24.1@4475,2907.5 R115.1@4475,2842.5
UHVD33: CB26.1 CT84.1 R114.1 U15.208 | length 324.9
  Top w8: U15.208@3575.69,2833.66 v2(3672,2833.66)
  Bottom w30: v2(3672,2833.66) 3732.5,2833.66 3741.16,2833.66 CB26.1@3732.5,2837.5
  Bottom w40: R114.1@3732.5,2762.5 3732.5,2833.66 CB26.1@3732.5,2837.5 CT84.1@3732.5,2912.5
UOVD33: CB30.1 CT92.1 R116.1 U15.214 | length 271
  Top w8: U15.214@3575.69,2739.17 v2(3662.5,2739.17)
  Bottom w30: CB30.1@3662.5,2705 v2(3662.5,2739.17)
  Bottom w40: R116.1@3512.5,2705 CT92.1@3587.5,2705 CB30.1@3662.5,2705
UPL0VD12: CB11.1 CT86.1 R113.1 U15.210 | length 374.8
  Top w8: v2(3387.5,2750) 3427.17,2789.67 3487.5,2789.67 3500,2802.17 U15.210@3575.69,2802.17
  Top w40: CB11.1@3342.5,2750 v2(3387.5,2750)
  Bottom w40: CT86.1@3342.5,2825 R113.1@3342.5,2750 v2(3387.5,2750)
UPL1VD12: CB25.1 CT83.1 R112.1 U15.204 | length 366.1
  Top w8: U15.204@3575.69,2896.65 v2(3662.5,2896.65)
  Bottom w30: CT83.1@3605,2900 3608.35,2896.65 v2(3662.5,2896.65)
  Bottom w40: R112.1@3545,3000 3545,2962.5 3557.5,2950 3592.5,2950 3605,2937.5 CT83.1@3605,2900 CB25.1@3605,2825
UR0RX: CON39.3 U20.13 | length 1595
  Top w8: U20.13@3937.5,837.5 3935,840 3888,840 3856,808 3856,600 3904,552 4736,552 4828,460 4828,396 4800,368 4723,368 CON39.3@4666,425
UR0RXO: SW42.8 U20.12 | length 577.7
  Top w8: U20.12@3937.5,787.5 4100.5,787.5 4113,775 4329,775 4352,752 4352,677 SW42.8@4300,625
UR0TX: CON39.2 U20.14 | length 1386.8
  Top w8: U20.14@3937.5,887.5 3864,887.5 3840,863.5 3840,584 3888.5,535.5 4663.5,535.5 CON39.2@4774,425
UR0TXI: SW42.7 U20.11 | length 367.7
  Top w8: U20.11@3937.5,737.5 4087.68,737.5 4100.18,725 SW42.7@4300,725
UR1CTS: CON37.7 U18.8 | length 831.9
  Top w8: U18.8@1250,625 1184,625 1088,529 1088,296 1144,240 1361.5,240 CON37.7@1432.5,311
UR1CTSO: SW40.8 U18.9 | length 387.5
  Top w8: U18.9@1450,625 1552,625 1575,648 SW40.8@1828,648
UR1RTS: CON37.8 U18.7 | length 820.8
  Top w8: U18.7@1250,675 1285,675 1304,656 1304,600 1280,576 1168,576 1104,512 1104,312 1160,256 1269.5,256 CON37.8@1324.5,311
UR1RTSI: SW40.7 U18.10 | length 408.2
  Top w8: U18.10@1450,675 1515,675 1588,748 SW40.7@1828,748
UR1RX: CON37.3 U18.13 | length 461.5
  Top w8: CON37.3@1378.5,425 1378.5,808 1394.5,824 1449,824 U18.13@1450,825
UR1RXO: SW40.6 U18.12 | length 408.2
  Top w8: U18.12@1450,775 1510,775 1583,848 SW40.6@1828,848
UR1TX: CON37.2 U18.14 | length 756
  Top w8: U18.14@1450,875 1395,875 1324.5,804.5 1324.5,403.5 1360,368 1429.5,368 CON37.2@1486.5,425
UR1TXI: SW40.5 U18.11 | length 627.9
  Top w8: U18.11@1450,725 1509,725 1582,798 1862,798 1888,824 1888,888 SW40.5@1828,948
UR2CTS: CON38.7 U19.8 | length 773.5
  Top w8: U19.8@2712.5,637.5 2736,637.5 2736,280 2776,240 3011.5,240 CON38.7@3082.5,311
UR2CTSO: SW41.8 U19.9 | length 225
  Top w8: U19.9@2912.5,637.5 SW41.8@3137.5,637.5
UR2RTS: CON38.8 U19.7 | length 718.1
  Top w8: U19.7@2712.5,687.5 2713,688 2760,688 2776,672 2776,576 2752,552 2752,296 2792,256 2919.5,256 CON38.8@2974.5,311
UR2RTSI: SW41.7 U19.10 | length 245.7
  Top w8: U19.10@2912.5,687.5 3040,687.5 3090,737.5 SW41.7@3137.5,737.5
UR2RX: CON38.3 U19.13 | length 591.1
  Top w8: U19.13@2912.5,837.5 2864,837.5 2832,805.5 2832,632 2888,576 2948.5,576 3028.5,496 CON38.3@3028.5,425
UR2RXO: SW41.6 U19.12 | length 245.7
  Top w8: U19.12@2912.5,787.5 3016,787.5 3066,837.5 SW41.6@3137.5,837.5
UR2TX: CON38.2 U19.14 | length 857.7
  Top w8: U19.14@2912.5,887.5 2912,888 2864,888 2816,840 2816,616 2872,560 2928,560 2974.5,513.5 2974.5,393.5 3000,368 3079.5,368 CON38.2@3136.5,425
UR2TXI: SW41.5 U19.11 | length 467.4
  Top w8: U19.11@2912.5,737.5 3024,737.5 3074,787.5 3171.5,787.5 3200,816 3200,875 SW41.5@3137.5,937.5
UR6CTS: CON40.7 U21.8 | length 804.5
  Top w8: U21.8@6125,637.5 6122.5,640 6056,640 6040,624 6040,304 6096,248 6319.5,248 CON40.7@6382.5,311
UR6CTSO: SW43.8 U21.9 | length 192.7
  Top w8: U21.9@6325,637.5 6428.98,637.5 6441.48,650 SW43.8@6512.5,650
UR6RTS: CON40.8 U21.7 | length 516.4
  Top w8: U21.7@6125,687.5 6125.5,688 6176,688 6200,664 6200,512 6166.5,478.5 6166.5,385.5 6184,368 6217.5,368 CON40.8@6274.5,311
UR6RTSI: SW43.7 U21.10 | length 213.4
  Top w8: U21.10@6325,687.5 6400,687.5 6462.5,750 SW43.7@6512.5,750
UR6RX: CON40.3 U21.13 | length 492.3
  Top w8: U21.13@6325,837.5 6277.5,837.5 6264,824 6264,568.5 6328.5,504 CON40.3@6328.5,425
UR6RXO: SW43.6 U21.12 | length 213.4
  Top w8: U21.12@6325,787.5 6387.5,787.5 6450,850 SW43.6@6512.5,850
UR6TX: CON40.2 U21.14 | length 768
  Top w8: U21.14@6325,887.5 6264,887.5 6240.5,864 6240.5,544 6274.5,510 6274.5,405.5 6312,368 6379.5,368 CON40.2@6436.5,425
UR6TXI: SW43.5 U21.11 | length 438.5
  Top w8: U21.11@6325,737.5 6408,737.5 6470.5,800 6551,800 6576,825 6576,886.5 SW43.5@6512.5,950
UR10CTSO: SW44.8 U22.9 | length 200
  Top w8: U22.9@7437.5,650 SW44.8@7637.5,650
UR10RTSI: SW44.7 U22.10 | length 220.7
  Top w8: U22.10@7437.5,700 7508,700 7558,750 SW44.7@7637.5,750
UR10RXO: SW44.6 U22.12 | length 220.7
  Top w8: U22.12@7437.5,800 7504,800 7554,850 SW44.6@7637.5,850
UR10TXI: SW44.5 U22.11 | length 439.4
  Top w8: U22.11@7437.5,750 7502,750 7552,800 7672,800 7696,824 7696,891.5 SW44.5@7637.5,950
URACTS: CON41.7 U22.8 | length 1002.6
  Top w8: U22.8@7237.5,650 7294,650 7432,512 7904,512 7949.5,466.5 7949.5,394.5 7984,360 8008.5,360 CON41.7@8057.5,311
URARTS: CON41.8 U22.7 | length 1151.9
  Top w8: U22.7@7237.5,700 7164,700 7152,688 7152,584 7240,496 7816,496 7841.5,470.5 7841.5,390.5 7869.41,362.59 7897.91,362.59 CON41.8@7949.5,311
URARX: CON41.3 U22.13 | length 1385.7
  Top w8: U22.13@7437.5,850 7402,850 7384,832 7384,624 7464,544 8093.5,544 8165.5,472 8165.5,397.5 8136,368 8060.5,368 CON41.3@8003.5,425
URATX: CON41.2 U22.14 | length 1171
  Top w8: U22.14@7437.5,900 7396,900 7360,864 7360,616 7448,528 8008.5,528 CON41.2@8111.5,425
USBOC0: LED10.2 Q5.B R90.1 SW34.2 | length 1078.5
  Top w8: LED10.2@775,2395 780,2400 957.68,2400 Q5.B@970.28,2412.6 v1(1024,2412.6) ; R90.1@1070,2412.5 1069.9,2412.6 v1(1024,2412.6) ; v1(1337.5,2250) 1225.25,2362.25 1036.75,2362.25 1024,2375 v1(1024,2412.6)
  Bottom w8: v1(1337.5,2250) 1389.3,2198.2 1392,2198.2 1392,2195 SW34.2@1600,1987
USBOC1: LED8.2 Q4.B R88.1 SW34.3 | length 1194.3
  Top w8: LED8.2@775,2582.5 784.5,2592 982.78,2592 Q4.B@982.78,2600.1 1069.9,2600.1 R88.1@1070,2600 1072,2598 v1(1072,2560)
  Bottom w8: v1(1072,2560) 1107.5,2524.5 1371.5,2524.5 1408,2488 1408,2279 SW34.3@1600,2087
UVH: CON20.1 CT3.2 CT4.2 U17.6 U17.7 U17.8 | length 7790.4
  Top w15: U17.6@869.74,1974.32 900,1974.32 900,1975.5 v2(912.5,1988) ; U17.7@869.74,1999.91 v2@912.5,1999.91 ; U17.8@869.74,2025.5 v2(912.5,2025.5)
  Top w40: CON20.1@525,3575.3 656,3575.3 659.65,3571.65 ; v2(656,3016) v2(656,3060) 656,3568 659.65,3571.65 ; v2@912.5,1999.91 v2(912.5,2025.5) ; CT3.2@955,6987.5 CT4.2@955,6912.5 v2(1072,6912.5) ; v2(1120,4032) v2(1088,4000) 659.65,3571.65 ; v1(1144,4696) v2(1176,4728) 1400,4952 2024,4952 2144,5072 2144,5992 v2(2016,6120) v2(1984,6152)
  Bottom w40: v2(656,3060) v2(656,3016) 656,2720 696,2680 696,2172 828,2040 898,2040 v2(912.5,2025.5) v2(912.5,1988) ; v2(1072,6912.5) 1024.5,6912.5 v2(1024,6912) 984,6912 928,6856 928,6433 977,6384 1575,6384 1807,6152 v2(1984,6152) v2(2016,6120) ; v2(1088,4000) v2(1120,4032) 1144,4056 v1(1144,4696) v2(1176,4728)
UVO: CON24.1 CT45.2 CT46.2 R83.2 U16.6 U16.7 U16.8 | length 1968.9
  Top w15: U16.6@869.74,2161.82 897.82,2161.82 912,2176 ; U16.7@869.74,2187.41 912,2187.41 ; U16.8@869.74,2213 912,2213
  Top w20: CON24.1@312.2,2837.8 482.2,2837.8 R83.2@482.5,2850
  Top w40: R83.2@482.5,2850 482.78,2901 v2(483,2941) ; CT46.2@555,2000.5 CT45.2@555,2075.5 567.5,2088 v2(592,2088) v2(632,2088) 904,2088 928,2112 928,2160 912,2176 912,2187.41 912,2213
  Bottom w8: v2(483,2901) v2(483,2941)
  Bottom w40: v2(483,2941) v2(483,2901) 482.69,2528 482.69,2173.31 568,2088 v2(592,2088) v2(632,2088)
VD12: CB12.1 CB14.1 CB15.1 CB17.1 CB20.1 CB23.1 CB33.1 CT17.1 CT18.1 CT41.1 CT69.1 CT70.1 CT71.1 CT76.1 CT79.1 CT81.1 CT95.1 L13.1 R17.2 R112.2 R113.2 SW12.2 U15.12 U15.21 U15.82 U15.102 U15.146 U15.163 U15.166 U15.203 | length 3592.9
  Top w8: v2(3488,3576) 3521.68,3542.32 U15.163@3575.69,3542.32 ; U15.203@3575.69,2912.4 3625,2912.4 v2(3662.5,2949.9) ; U15.166@3575.69,3495.08 3642.42,3495.08 3662.5,3475 v2(3662.5,3450) ; U15.12@3843.41,2613.19 3843.41,2532.12 3862.5,2513.03 3862.58,2512.52 3862.58,2436 3872,2436 CB12.1@3872,2430 ; v2(3906.15,3528) 3922.15,3544 U15.146@3922.15,3636.81 ; v2(3950,2475) 3985.14,2510.14 U15.21@3985.14,2613.19 ; v2(4514.67,3425) 4537.5,3447.83 U15.102@4599.31,3447.83 ; U15.82@4599.31,3132.87 4664,3132.87 v2(4676.87,3120)
  Top w10: v2(1557,6332) 1557,6374.64 1557.37,6375 1562.5,6380 ; 1557.5,6375 1562.5,6380 ; R17.2@1612.5,6430 1562.5,6380
  Top w30: SW12.2@1662.5,6130 1727.5,6130 CT18.1@1732.5,6125 ; v2(3737.5,2392.5) 3775,2430 CT41.1@3800,2430
  Top w40: v2(1732.5,6073) CT18.1@1732.5,6125 CT17.1@1732.5,6200 ; CT41.1@3800,2430 3872,2430 CB12.1@3875,2430
  Bottom w40: v2(1557,6332) 1557.5,6331.5 1557.5,6275 1732.5,6100 v2(1732.5,6073) ; v2(3142,3680) CT69.1@3142,3624 3143,3625 L13.1@3207.5,3625 ; v2(3237.5,2750) R113.2@3282.5,2750 ; v2(3488,3576) 3488,3552 3515,3525 CB15.1@3531,3525 ; CB15.1@3531,3526.5 3529.5,3526.5 CB15.1@3531,3525 ; v2(3545,3656) CT70.1@3545,3600 CB15.1@3545,3525 CB15.1@3531,3525 ; R112.2@3605,3000 3637.5,3000 3662.5,2975 v2(3662.5,2949.9) ; v2(3662.5,3450) CB17.1@3605,3450 CT76.1@3605,3375 v2(3664,3375) ; CT95.1@3875,2430 CT95.1@3892,2430 ; v2(3892,2476) CT95.1@3892,2430 ; v2(3906.15,3528) 3937.5,3559.35 CB14.1@3937.5,3632.5 CT71.1@4012.5,3632.5 v2(4012.5,3568) ; v2(3950,2475) CB33.1@3950,2430 CT95.1@3892,2430 ; v2(4514.67,3425) 4519.67,3430 CB20.1@4600,3430 CT79.1@4675,3430 4675,3512.5 v2(4737.5,3575) ; v2(4676.87,3120) 4740,3120 CB23.1@4745,3125 CT81.1@4745,3200 4745,3296 4785,3336 v2(4864,3336)
VD18: CM1.1 CM2.1 CM3.1 CM4.1 CM5.1 CM6.1 CT10.1 CT12.1 CT67.1 CT93.1 J6.3 J7.3 R14.2 SW10.2 U15.14 U15.16 U15.18 U15.148 U15.150 U15.152 | length 9307.1
  Top w8: v2(3815.16,3750) 3827.66,3737.5 U15.152@3827.66,3636.81 ; U15.150@3859.15,3636.81 3859.15,3575 v2@3867.61,3566.54 ; U15.14@3874.9,2613.19 3874.9,2687.5 3887.4,2700 3900,2700 ; U15.148@3890.65,3636.81 3890.65,3589.57 v2@3867.61,3566.54 ; U15.16@3906.4,2613.19 3906.4,2687.5 3918.9,2700 v2(3937.89,2700) U15.18@3937.89,2613.19 ; v2@3867.61,3566.54 3864,3562.92 v2(3864,3560) 3871.65,3562.5 v2@3867.61,3566.54
  Top w30: SW10.2@2300,6492.5 2377.5,6492.5 CT12.1@2382.5,6487.5
  Top w40: J7.3@237.5,6125 J6.3@237.5,6387.5 ; v2(2416,6400) 2384,6432 v2(2382.5,6432) CT12.1@2382.5,6487.5 CT10.1@2382.5,6562.5 2382.5,6598.5 2400,6616 2426,6616 2450,6640 R14.2@2450,6657.5 ; v2(2928,4464) v2(2984,4464) 2984,4800 v2(3080,4896) v2(3048,4928) ; v2(3864,3560) 3848,3544 3848,3408 3872,3384 3872,2854.5 v2(3942.5,2784) ; 3900,2700 3918.9,2700
  Bottom w40: J6.3@237.5,6387.5 314,6464 552,6464 832,6184 1120,6184 1280,6024 2040,6024 v2@2415.25,6399.25 ; v2(2382.5,6432) v2@2415.25,6399.25 ; v2(2416,6400) v2@2415.25,6399.25 ; v2(2984,4464) v2(2928,4464) 2824,4464 2784,4424 2784,4240 2848,4176 3575.5,4176 3807.5,3944 CM1.1@3807.5,3875 CT67.1@3807.5,3800 3807.5,3757.66 v2(3815.16,3750) 3807.5,3742.34 CM2.1@3807.5,3687.5 CM3.1@3807.5,3612.5 3807.5,3592.5 3840,3560 3848,3560 ; v2(3080,4896) v2(3048,4928) 2576,5400 2576,6238.5 v2@2415.25,6399.25 ; v2(3847.57,3515.66) 3848,3516.09 3848,3560 ; v2(3864,3560) 3848,3560 ; v2(3937.89,2700) v2@3940.19,2697.69 ; CM6.1@3942.5,2587.5 CT93.1@3942.5,2662.5 3942.5,2695.39 v2@3940.19,2697.69 ; CM4.1@3942.5,2825 v2(3942.5,2784) CM5.1@3942.5,2750 3942.5,2700 v2@3940.19,2697.69
VD33: C36.2 C37.1 C38.2 C39.1 C40.2 C41.1 C42.2 C43.1 C44.2 C45.1 CB3.2 CB4.2 CB5.1 CB16.1 CB18.1 CB19.1 CB21.1 CB22.1 CB27.1 CB28.1 CB32.1 CON1.1 CON1.2 CON3.4 CON4.4 CON12.1 CON12.2 CON13.1 CON13.2 CON14.1 CON14.2 CON15.3 CON15.4 CON16.1 CON16.2 CON17.1 CON17.2 CON19.1 CON19.2 CON21.1 CON21.2 CON22.1 CON22.2 CON23.1 CON23.2 CON25.1 CON25.2 CON26.1 CON26.2 CON27.1 CON27.2 CON28.1 CON28.2 CON30.1 CON30.2 CON32.1 CON32.2 CON33.1 CON33.2 CON34.1 CON34.2 CON35.1 CON35.2 CT11.1 CT15.2 CT20.1 CT27.2 CT29.2 CT30.2 CT31.1 CT33.1 CT35.2 CT36.2 CT37.2 CT38.2 CT39.2 CT40.2 CT42.2 CT47.2 CT48.2 CT49.2 CT50.2 CT51.2 CT52.2 CT60.2 CT62.2 CT63.2 CT64.2 CT65.2 CT68.2 CT72.1 CT77.1 CT78.1 CT80.1 CT82.1 CT87.1 CT88.1 CT91.2 CT94.1 CT96.2 J6.1 J7.1 J8.1 L7.2 L11.1 L12.1 L14.1 Q3.S Q6.S Q7.S R7.2 R8.2 R13.2 R15.1 R16.2 R18.2 R23.1 R27.2 R34.2 R35.1 R71.1 R73.1 R87.2 R88.2 R89.2 R90.2 R91.2 R93.2 R98.2 R99.2 R114.2 R115.2 R116.2 RN3.1 RN3.3 RN3.5 RV1.1 SW5.1 SW9.2 U6.8 U7.2 U11.3 U12.3 U15.10 U15.20 U15.44 U15.80 U15.104 U15.144 U15.154 U15.183 U18.16 U19.16 U20.16 U21.16 U22.16 | length 13957.9
  Top w8: v2(3400,3243.36) 3416,3227.36 U15.183@3575.69,3227.36 ; v2(3776,3531.84) 3796.16,3552 U15.154@3796.16,3636.81 ; U15.10@3811.91,2613.19 3811.91,2500.59 v2(3825,2487.5) ; U15.144@3953.64,3636.81 3953.64,3552 v2(3977.64,3528) ; U15.20@3969.39,2613.19 3969.39,2656.89 v2(4012.5,2700) ; v2(4325,2687.5) 4347.34,2665.16 U15.44@4347.34,2613.19 ; v2(4505,3487.5) 4507.14,3487.5 4515.31,3479.33 U15.104@4599.31,3479.33 ; v2(4512,3101.38) U15.80@4599.31,3101.38
  Top w20: SW9.2@1500,6530 1565,6530 CT11.1@1570,6525 ; U6.8@8875.5,6361 8897.5,6361 U7.2@8897.5,6248.5
  Top w25: U18.16@1450,975 1455,975 C37.1@1455,1062.5 ; C39.1@2905,1075 2905,987.5 U19.16@2912.5,987.5 ; U20.16@3937.5,987.5 3967.5,987.5 C41.1@3967.5,1075 ; U12.3@6012.5,5112.5 v2(6080,5112.5) ; U11.3@6012.5,5375 v2(6096,5375) ; U21.16@6325,987.5 6342.5,987.5 C43.1@6342.5,1087.5 ; U22.16@7437.5,1000 7442.5,1000 C45.1@7442.5,1087.5
  Top w40: v2(640,2395) R89.2@700,2395 ; v2(640,2582.5) R87.2@700,2582.5 ; R73.1@755,4000 v2(800,4000) ; R71.1@755,4087.5 v2(804,4087.5) ; L7.2@1055,5150 1062.5,5157.5 CT27.2@1062.5,5220 1062.5,5221 v2(1104,5221) ; R93.2@1130,2087 v2(1179,2087) ; R91.2@1130,2237 v2(1179,2237) ; CT42.2@1130,2312 v2(1179,2312) ; R90.2@1130,2412.5 v2(1184,2412.5) ; R88.2@1130,2600 v2(1175,2600) ; v2(1208,1062.5) C36.2@1257.5,1062.5 ; v2(1300,3831) CT31.1@1352.5,3831 1352.5,3893.5 L11.1@1360,3901 ; R7.2@1400,6857.5 v2(1456,6857.5) ; C37.1@1455,1062.5 v2(1504,1062.5) ; v2(1464.5,3617) CT33.1@1524.5,3617 1532,3624.5 L12.1@1532,3687 ; CT11.1@1570,6525 v2(1570,6762.5) ; v2(1650,6855) R8.2@1712.5,6855 ; v2(1875,6237.5) R23.1@1875,6282.5 ; R13.2@2307.5,6662.5 v2(2307.5,6728) ; v2(2312,1807.5) CT47.2@2362.5,1807.5 ; CON34.1@2362.5,1587.5 CON34.2@2362.5,1687.5 CT47.2@2362.5,1807.5 ; CON27.2@2362.5,2487.5 CON27.1@2462.5,2487.5 2462.5,2382.5 CT39.2@2442.5,2362.5 ; CON21.2@2362.5,3487.5 CON21.1@2462.5,3487.5 2467.5,3482.5 CT37.2@2467.5,3350 ; v2(2408,1807.5) CT47.2@2362.5,1807.5 ; v2(2442.5,2312.5) CT39.2@2442.5,2362.5 ; v2(2467.5,3280) CT37.2@2467.5,3350 ; v2(2500,2362.5) CT39.2@2442.5,2362.5 ; v2(2524.95,3349) 2524.51,3350 CT37.2@2467.5,3350 ; v2(2656,1075) C38.2@2707.5,1075 ; CON28.2@2725,2487.5 CON28.1@2825,2487.5 2825,2367.5 CT40.2@2817.5,2362.5 ; v2(2800,4795) CT29.2@2862.5,4795 ; v2(2816,6664) R15.1@2819,6706 ; v2(2817.5,2312.5) CT40.2@2817.5,2362.5 ; CON12.2@2862.5,4587.5 CON12.1@2862.5,4687.5 CT29.2@2862.5,4795 ; v2(2872,2362.5) CT40.2@2817.5,2362.5 ; C39.1@2905,1075 v2(2956,1075) ; v2(2920,4795) CT29.2@2862.5,4795 ; v2(2937.5,1736) CT50.2@2937.5,1680 CT50.2@2945,1687.5 ; v2(2992,1734.5) CT50.2@2945,1687.5 ; CON35.1@3062.5,1587.5 CON35.2@3062.5,1687.5 CT50.2@2945,1687.5 ; v2(3745,1032) C40.2@3745,1075 ; C41.1@3967.5,1075 v2(4016,1075) ; v2(4016,1795) CT48.2@4062.5,1795 ; CON32.2@4062.5,1587.5 CON32.1@4062.5,1687.5 CT48.2@4062.5,1795 ; v2(4112,1795) CT48.2@4062.5,1795 ; v2(4237.5,4167.5) CT30.2@4287.5,4167.5 ; CON17.1@4287.5,4387.5 CON17.2@4287.5,4287.5 CT30.2@4287.5,4167.5 ; v2(4337.5,4167.5) CT30.2@4287.5,4167.5 ; CON3.4@4837.89,6496.16 4837.89,6432 4912,6357.89 4912,6330.5 CB3.2@4912.5,6330 CB4.2@4987.5,6330 v2(4987.5,6376) ; v2(5137.5,1795) CT49.2@5187.5,1795 ; CON33.2@5187.5,1587.5 CON33.1@5187.5,1687.5 CT49.2@5187.5,1795 ; v2(5237.5,1795) CT49.2@5187.5,1795 ; CON25.2@5550,2537.5 CON25.1@5650,2537.5 CT38.2@5782.5,2537.5 v2(5782.5,2592) ; CON22.2@5550,3487.5 CON22.1@5650,3487.5 CT36.2@5782.5,3487.5 CT35.2@5782.5,3562.5 ; v2(5744,3562.5) CT35.2@5782.5,3562.5 ; v2(5784,3608) 5784,3562.5 CT35.2@5782.5,3562.5 ; v2(5888,6275) R27.2@5945,6275 5937.6,6267.6 Q3.S@5937.6,6195.28 ; v2(6157.5,1037.5) C42.2@6157.5,1087.5 ; C43.1@6342.5,1087.5 v2(6392,1087.5) ; CON4.4@6362.89,6496.16 6362.89,6424 6425,6361.89 CT15.2@6425,6330 v2(6464,6330) ; v2(7192,1087.5) C44.2@7245,1087.5 ; C45.1@7442.5,1087.5 v2(7496,1087.5) ; SW5.1@7762.5,6925 v2(7762.5,7040) ; RV1.1@8055,6975 v2(8104,6975) ; v2(8822.5,5961) R34.2@8822.5,6006 ; U7.2@8897.5,6248.5 8897.5,6078.5 CT20.1@8910,6066 CB5.1@8985,6066 v2(8985,6123.5) ; R35.1@9060,6006 v2(9116,6006) ; R18.2@9365,6361 v2(9409,6361) ; R16.2@9365,6461 v2(9409,6461)
  Bottom w8: v2@4507.19,3106.19 v2(4512,3101.38)
  Bottom w20: 3728,6843.5 RN3.1@3728,6886.5 ; RN3.3@3760,6886.5 3760,6843.5 3774,6843.5 3792,6861.5 RN3.5@3792,6886.5
  Bottom w30: v2(3640,2594) CT94.1@3736,2594 ; v2(4012.5,2700) CB27.1@4012.5,2732.5
  Bottom w40: Q7.S@745.28,850.1 v2(787.5,850.1) ; CON19.2@2725,3587.5 CON19.1@2825,3587.5 2932.5,3587.5 CT68.2@2937.5,3582.5 v2(2996,3582.5) ; v2(2905,1862.5) 2925,1882.5 CT96.2@2962.5,1882.5 ; v2(2962.5,1837.5) CT96.2@2962.5,1882.5 ; CON30.2@3062.5,1987.5 CON30.1@3062.5,1887.5 2967.5,1887.5 CT96.2@2962.5,1882.5 ; CON16.2@3262.5,4287.5 CON16.1@3262.5,4387.5 CT65.2@3357.5,4387.5 v2(3357.5,4325) ; v2(3400,3243.36) 3450.86,3192.5 CT82.1@3475,3192.5 CB22.1@3550,3192.5 ; v2(3512.5,2600) R116.2@3512.5,2645 ; v2(3586.5,6881.5) CT52.2@3649,6881.5 3649,6876 3681.5,6843.5 3728,6843.5 3760,6843.5 ; v2(3725,3525) CB18.1@3725,3480 3776,3480 ; CT94.1@3736,2594 CB32.1@3808,2594 3808,2504.5 v2(3825,2487.5) ; v2(3776,3531.84) 3776,3480 ; R114.2@3792.5,2762.5 v2(3825,2762.5) ; CT77.1@3800,3480 3776,3480 ; CON1.1@3900,7462.5 CON1.2@3900,7362.5 3905,7367.5 CT51.2@4000,7367.5 ; CB19.1@3950,3480 CB19.1@3953.64,3480 ; v2(3977.64,3528) 3953.64,3504 CB19.1@3953.64,3480 ; v2(4000,7425) CT51.2@4000,7367.5 ; CB27.1@4012.5,2732.5 CT87.1@4087.5,2732.5 v2(4087.5,2688) ; CON13.2@4037.5,4587.5 CON13.1@4037.5,4687.5 4042.5,4692.5 CT62.2@4150,4692.5 v2(4216,4692.5) ; v2(4050,7367.5) CT51.2@4000,7367.5 ; v2(4075,3480) CT78.1@4025,3480 CB19.1@3953.64,3480 ; v2(4250,2688) CT88.1@4250,2732.5 CB28.1@4325,2732.5 v2(4325,2687.5) ; v2(4400,2687.5) 4400,2732.5 L14.1@4475,2732.5 ; L14.1@4475,2717.5 L14.1@4475,2732.5 ; R115.2@4475,2782.5 L14.1@4475,2732.5 ; R98.2@4492.5,6887.5 4496,6887.5 v2(4496,6968) ; Q6.S@4499.9,6795.28 4502.68,6792.5 v2(4656,6792.5) ; v2(4505,3272) CB21.1@4505,3225 CT80.1@4505,3150 4505,3108.38 v2@4507.19,3106.19 ; v2(4505,3487.5) 4517.5,3500 CB16.1@4517.5,3537.5 CT72.1@4517.5,3612.5 v2(4562.5,3600) ; CON14.2@5187.5,4587.5 CON14.1@5187.5,4687.5 5189,4686 CT63.2@5336,4686 ; v2(5336,4736) CT63.2@5336,4686 ; v2(5392,4686) CT63.2@5336,4686 ; v2(5850,6825) R99.2@5850,6882.5 ; CON23.1@8478.15,4762.6 CON23.2@8578.15,4762.6 8732.4,4762.6 CT60.2@8732.5,4762.5 v2(8732.5,4824) ; v2(8672,4824) v2(8732.5,4824) ; v2(8732.5,4880) v2(8732.5,4824) ; v2(9837.5,4392) CT64.2@9837.5,4445 CT64.2@9845,4437.5 ; v2(9888,4394.5) CT64.2@9845,4437.5 ; CON26.1@9962.5,2575 CON26.1@9967.5,2575 ; v2(9967.5,2750) CT91.2@9967.5,2687.5 ; v2(10025,2687.5) CT91.2@9967.5,2687.5 ; CON26.2@10062.5,2575 CON26.1@9967.5,2575 ; CON15.4@10062.5,4437.5 CON15.3@9962.5,4437.5 CT64.2@9845,4437.5 ; CON26.1@9967.5,2575 CT91.2@9967.5,2687.5
VDDA: CT26.2 L7.1 U10.31 | length 771.6
  Top w8: U10.31@1299.21,5410.14 1299.21,5353.79 v2(1344,5309)
  Top w40: v2(904,5165) 975,5165 ; CT26.2@975,5220 975,5165 ; L7.1@995,5150 980,5165 975,5165
  Bottom w40: v2(904,5165) 984,5165 1088,5269 1304,5269 v2(1344,5309)
VDDB: CON5.1 CT22.2 L5.1 R49.1 R50.1 RX3.1 RX4.1 U10.14 | length 2322.7
  Top w10: v2(1200,5681.47) 1220.47,5661 U10.14@1220.47,5614.86
  Top w40: R49.1@187.5,5517.5 R50.1@262.5,5517.5 262.5,5557 302.5,5597 v2(368,5597) v2(419.06,5597) ; L5.1@398.75,5950 406.25,5957.5 CT22.2@468.75,5957.5 552,5957.5 572,5937.5 CON5.1@712.5,5937.5 ; RX3.1@1012.5,5855 v2(1012.5,5896) 1052.5,5936 1192,5936 1237.5,5890.5 RX4.1@1237.5,5855
  Bottom w40: v2(368,5597) v2(419.06,5597) 589,5597 648,5656 648,5816 712.5,5880.5 CON5.1@712.5,5937.5 971,5937.5 v2(1012.5,5896) 1012.5,5739.5 1040,5712 1169.47,5712 v2(1200,5681.47)
VDDC: CT16.2 L3.1 U10.13 | length 1384.1
  Top w10: v2(1224,5733) 1240.16,5716.84 U10.13@1240.16,5614.86
  Top w40: CT16.2@398.75,6225 L3.1@398.75,6300 776,6300 v2(1016,6060) v2(1048,6028)
  Bottom w40: v2(1048,6028) 1064,6012 1064,5800 1096,5768 1189,5768 v2(1224,5733)
VIN: CBX1.2 CT1.1 CT54.1 CT56.1 CT57.1 J2.2 J8.3 U3.4 U4.4 U8.4 UX1.1 UX1.3 | length 2940.5
  Top w20: v2(1237.4,6529) U3.4@1237.4,6570.03 ; U4.4@2024.9,6532.53 v2(2024.9,6575) ; UX1.3@3937.7,6187.5 3937.7,6217.7 3960,6240 3988.5,6240 4012.5,6216 UX1.1@4012.5,6187.5
  Top w40: CBX1.2@481.25,5688.75 512,5688.75 535.25,5712 v2(584,5712) ; v2(608,7480) CT1.1@662.5,7480 ; v2(662.5,7536) CT1.1@662.5,7480 ; J2.2@787.5,7487.5 667.5,7487.5 CT1.1@662.5,7480 ; U8.4@1387.4,6182.53 v2(1387.4,6224) ; v2(3200,6328) 3288,6240 3960,6240
  Bottom w20: v2(1237.4,6529) 1246,6537.6 1246,6584 CT54.1@1242.5,6587.5
  Bottom w40: CT57.1@2030,6437.5 CT56.1@2030,6512.5 2030,6569.9 v2(2024.9,6575) 2065.9,6616 2344,6616 2632,6328 v2(3200,6328)
VREF: C23.2 U10.27 | length 229.1
  Top w10: 1188.47,5309 1220.47,5341 U10.27@1220.47,5410.14
  Top w40: C23.2@1162.5,5205 1162.5,5283.03 1188.47,5309